# Altium PCB 28Pins_Projects_V1I1_PCB.PcbDoc (part 1 of 2)
Units mil, origin at the board's own origin, x right, y up, seen from the top; angles counter-clockwise.
Board outline 2700 x 2100 mil, 2 copper layers (Top Layer, Bottom Layer), stack 61.756 mil thick; 106 components, 71 nets, 323 pads, 0 vias.
Unrouted connection lines stored in the file: 236.
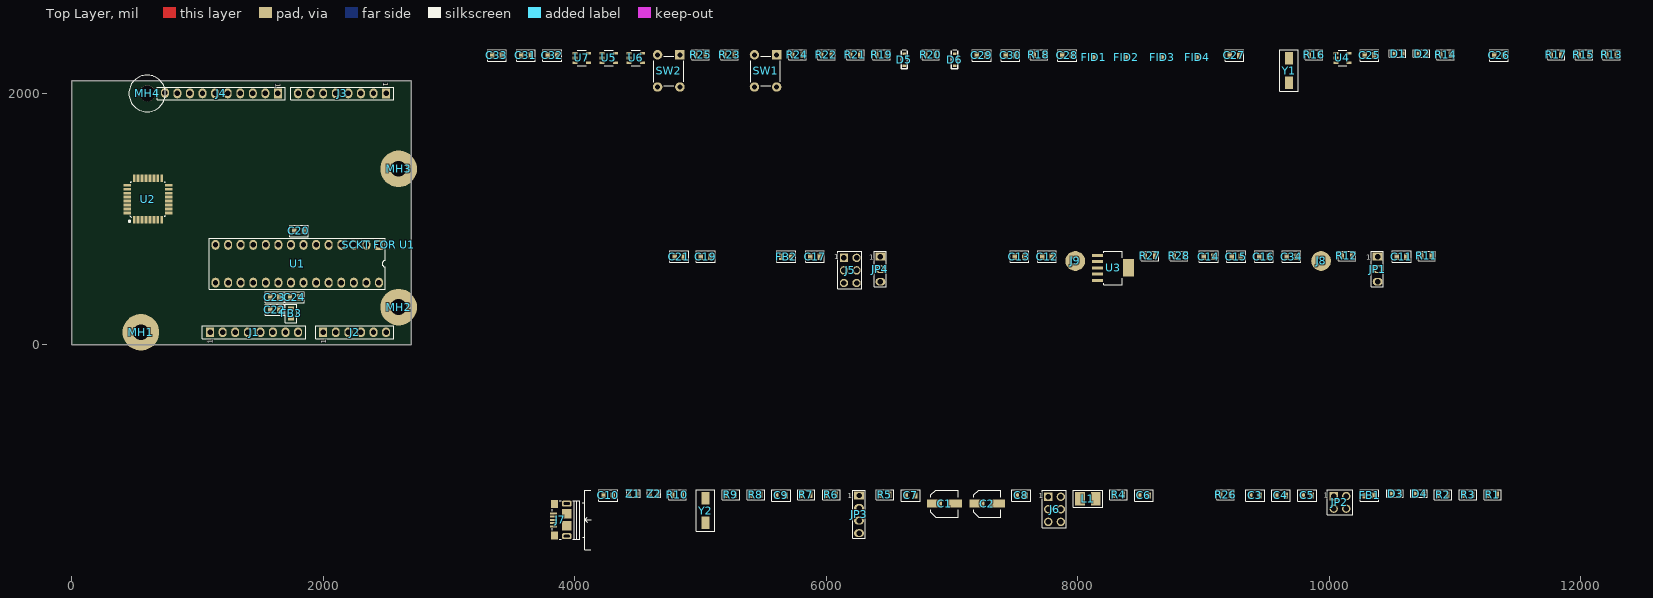
[diagram p0: Top Layer view]
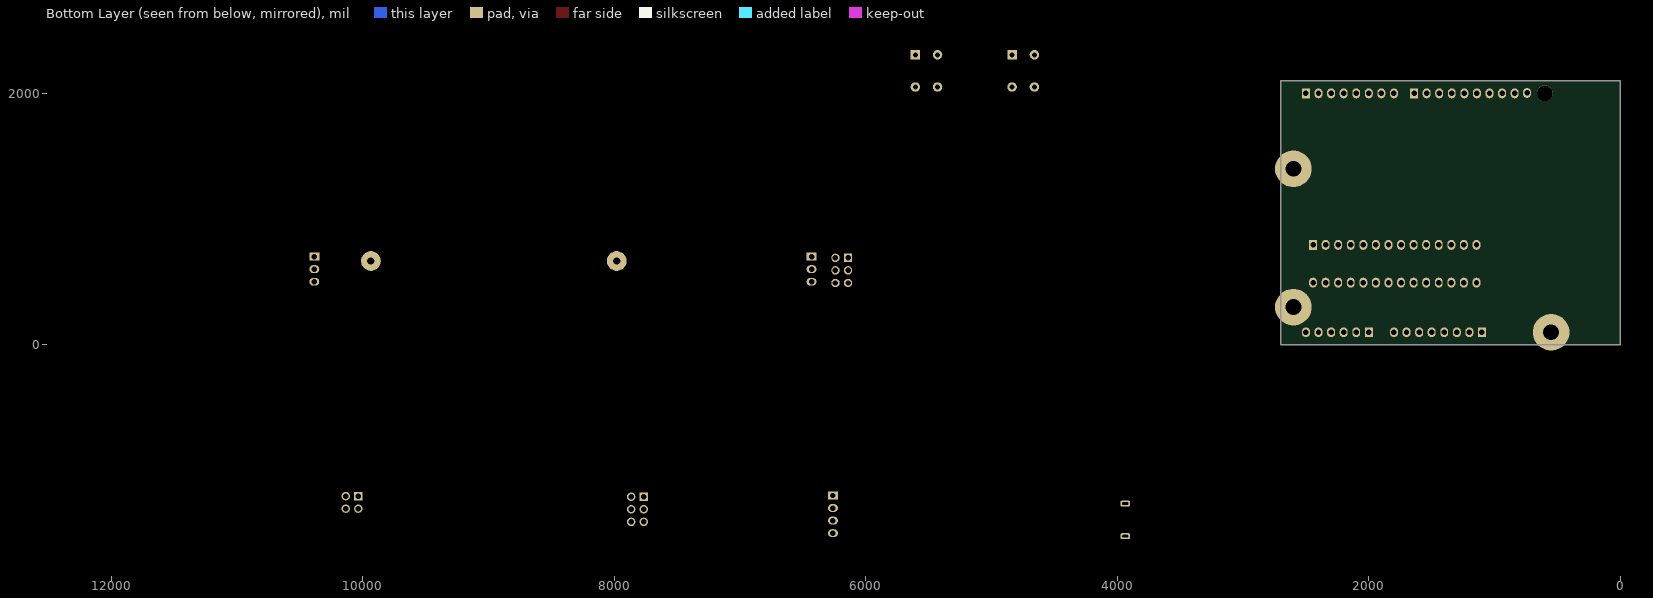
[diagram p1: Bottom Layer view, seen from below]

## Layer stack, top to bottom
Top Solder: solder mask 1, SM-001, Dk 4
Top Layer: signal copper 1.378
Dielectric 1: core 59, Core-043, Dk 4.3
Bottom Layer: signal copper 1.378
Bottom Solder: solder mask 1, SM-001, Dk 4

## Board outline
0,0 2700,0 2700,2100 0,2100

## Design rules (kind name [scope] priority, off if disabled: settings)
Clearance [All] p1: gap=10 ignorepadtopadclearanceinfootprint=FALSE except(0: Arc-Hole Track-Hole SMDPad-Hole THPad-Hole Via-Hole Fill-Hole Poly-Hole Region-Hole Text-Hole)
PolygonConnect [All] p1: connectstyle=Relief reliefconductorwidth=10 reliefentries=4 polygonreliefangle="90 Angle" airgapwidth=10
RoutingVias [All] p1: holewidth=28 width=50 viastyle="Through Hole" minholewidth=28 minwidth=50 maxholewidth=28 maxwidth=50
SolderMaskExpansion [All] p1: expansion=4 istentingtop=FALSE
Width [All] p1: maxlimit=10 minlimit=10 preferedwidth=10
30 further rules are at their usual default settings.

## Components (designator, comment, footprint, x,y, rotation, side; value= is the part's Value field where it differs from the comment)
C1 "100uF / 10V" C_AUL_C_SIZE 6941.97,-1263.03 r0 top
C2 "100uF / 10V" C_AUL_C_SIZE 7281.97,-1263.03 r0 top
C3 "10uF/16V" C0805 9411.97,-1198.03 r0 top
C4 "100n" C0805 9616.97,-1198.03 r0 top
C5 "100n" C0805 9826.97,-1198.03 r0 top
C6 "100n" C0805 8526.97,-1198.03 r0 top
C7 "1uF / 25V" C0805 6671.97,-1198.03 r0 top
C8 "100n" C0805 7551.97,-1198.03 r0 top
C9 "18pF" C0805 5641.97,-1198.03 r0 top
C10 "18pF" C0805 4266.97,-1198.03 r0 top
C11 "100n" C0805 10576.97,701.97 r0 top
C12 "10uF/16V" C0805 7756.97,701.97 r0 top
C13 "10uF/16V" C0805 7536.97,701.97 r0 top
C14 "100n" C0805 9041.97,701.97 r0 top
C15 "100n" C0805 9261.97,701.97 r0 top
C16 "100n" C0805 9481.97,701.97 r0 top
C17 "100n" C0805 5911.97,701.97 r0 top
C19 "10uF/16V" C0805 5041.97,701.97 r0 top
C20 "100n" C0805 1807.09,905.51 r0 top
C21 "10uF/16V" C0805 4831.97,701.97 r0 top
C22 "10uF/16V" C0805 1614.6,279 r0 top
C23 "100n" C0805 1614.6,378 r0 top
C24 "100n" C0805 1773.4,379 r180 top
C25 "18pF" C0805 10321.97,2301.97 r0 top
C26 "100n" C0805 11351.97,2301.97 r0 top
C27 "18pF" C0805 9246.97,2301.97 r0 top
C28 "100n" C0805 7916.97,2301.97 r0 top
C29 "100n" C0805 7236.97,2301.97 r0 top
C30 "100n" C0805 7466.97,2301.97 r0 top
C31 "100n" C0805 3611.97,2301.97 r0 top
C32 "100n" C0805 3821.97,2301.97 r0 top
C33 "100n" C0805 3381.97,2301.97 r0 top
C34 "10uF/16V" C0805 9701.97,701.97 r0 top
D1 "Green" LED_0603 10551.97,2316.97 r0 top
D2 "Orange LED" LED_0603 10741.97,2316.97 r0 top
D3 "Orange LED" LED_0603 10531.97,-1183.03 r0 top
D4 "Orange LED" LED_0603 10721.97,-1183.03 r0 top
D5 "BAT54HT1G" SOD323 6621.97,2266.97 r90 top
D6 "BAT54HT1G" SOD323 7021.97,2266.97 r90 top
FB1 "MPZ2012S601AT000" C0805 10321.97,-1198.03 r0 top
FB2 "MPZ2012S601AT000" C0805 5681.97,701.97 r0 top
FB3 "MPZ2012S601AT000" C0805 1744,249.6 r90 top
FID1 "FID_1MMC" FID_40X120D 8126.97,2286.97 r0 top
FID2 "FID_1MMC" FID_40X120D 8386.97,2286.97 r90 top
FID3 "FID_1MMC" FID_40X120D 8671.97,2286.97 r90 top
FID4 "FID_1MMC" FID_40X120D 8951.97,2286.97 r90 top
J1 "HRD FEMALE 1x8 2.54mm" Hdr_Female_1x8_2.54mm 1100,100 r90 top locked
J2 "HDR FEMALE 1x6 2.54mm" Hdr_Female_1x6_2.54mm 2000,100 r90 top locked
J3 "HRD FEMALE 1x8 2.54mm" Hdr_Female_1x8_2.54mm 2500,2000 r270 top locked
J4 "HEADER FEMALE 1x10 2.54mm" Hdr_Female_1x10_2.54mm 1640,2000 r270 top locked
J5 "HDR_2x3" HDR_2x3_2.54MM 6141.97,691.97 r0 top
J6 "HDR_2x3" HDR_2x3_2.54MM 7766.97,-1208.03 r0 top
J7 "10118193-0001LF" 10118193 3831.97,-1443.03 r90 top
J8 "4MMx1.5MM" PAD_WITH_HOLE_4MMx1.5MM 9936.97,666.97 r0 top
J9 "4MMx1.5MM" PAD_WITH_HOLE_4MMx1.5MM 7981.97,666.97 r0 top
JP1 "HRD_1x3" Hdr_Male_1x3_2.54mm 10386.97,601.97 r0 top
JP2 "HDR_2x2" HDR_2x2_2.54MM 10036.97,-1203.03 r0 top
JP3 "HDR_1x4_2.5MM" Hdr_Male_1x4_2.54mm 6261.97,-1348.03 r0 top
JP4 "HRD_1x3" Hdr_Male_1x3_2.54mm 6431.97,601.97 r0 top
L1 "2u2 / 2A" C1210_IND 8081.97,-1223.03 r0 top
MH1 "MH_7.4MMC_3.2MMD" MH_7.4MMD_3.2MMD 550,100 r0 top locked
MH2 "MH_7.4MMC_3.2MMD" MH_7.4MMD_3.2MMD 2600,300 r0 top locked
MH3 "MH_7.4MMC_3.2MMD" MH_7.4MMD_3.2MMD 2600,1400 r0 top locked
MH4 "MH_7.4MM_NC_3.2MMD" MH_7.4MMD_3.2MMD_NON_COPPER_NPHT 600,2000 r0 top locked
R1 "10K" R0805 11301.97,-1193.03 r0 top
R2 "560R" R0805 10906.97,-1193.03 r0 top
R3 "560R" R0805 11106.97,-1193.03 r0 top
R4 "10K" R0805 8326.97,-1193.03 r0 top
R5 "22R" R0805 6466.97,-1193.03 r0 top
R6 "22R" R0805 6041.97,-1193.03 r0 top
R7 "22R" R0805 5841.97,-1193.03 r0 top
R8 "0R" R0805 5441.97,-1193.03 r0 top
R9 "1M" R0805 5241.97,-1193.03 r0 top
R10 "1K" R0805 4816.97,-1193.03 r0 top
R11 "1K" R0805 10776.97,706.97 r0 top
R12 "1K" R0805 10141.97,706.97 r0 top
R13 "22R" R0805 12246.97,2306.97 r0 top
R14 "10K" R0805 10926.97,2306.97 r0 top
R15 "560R" R0805 12026.97,2306.97 r0 top
R16 "1M" R0805 9881.97,2306.97 r0 top
R17 "560R" R0805 11806.97,2306.97 r0 top
R18 "10K" R0805 7691.97,2306.97 r0 top
R19 "10K" R0805 6441.97,2306.97 r0 top
R20 "10K" R0805 6831.97,2306.97 r0 top
R21 "10K" R0805 6231.97,2306.97 r0 top
R22 "560R" R0805 6001.97,2306.97 r0 top
R23 "22R" R0805 5231.97,2306.97 r0 top
R24 "22R" R0805 5771.97,2306.97 r0 top
R25 "22R" R0805 5001.97,2306.97 r0 top
R26 "0R" R0805 9176.97,-1193.03 r0 top
R27 "0R" R0805 8576.97,706.97 r0 top
R28 "0R" R0805 8806.97,706.97 r0 top
"SCKT FOR U1" "28-DIP Socket" 28_DIP_7.62MM_SOCKET 2443.5,795 r270 top locked
SW1 "1825910-6" 1825910-6 5606.97,2306.97 r0 top
SW2 "1825910-6" 1825910-6 4836.97,2306.97 r0 top
U1 "ATMEGA328P-PU" 28_DIP_7.62MM 2443.5,795 r270 top locked
U2 "ATMEGA16U2-AU" TQFP32 606.3,1181.1 r90 top locked
U3 "TL1963A-33DCQR" DC1(R-PDSO-G6) 8281.97,611.97 r0 top
U4 "SN74AHC1G09DBVR" DBV_SOT_23_5 10106.97,2281.97 r0 top
U5 "SN74AHC1G09DBVR" DBV_SOT_23_5 4271.97,2281.97 r0 top
U6 "SN74AHC1G09DBVR" DBV_SOT_23_5 4486.97,2281.97 r0 top
U7 "SN74AHC1G09DBVR" DBV_SOT_23_5 4056.97,2281.97 r0 top
Y1 "ABM7-16.000MHZ-D2Y-T" ABM7_v1_1_BIG 9681.97,2181.97 r90 top
Y2 "ABM7-16.000MHZ-D2Y-T" ABM7_v1_1_BIG 5041.97,-1318.03 r90 top
Z1 "CG0603MLC-05E" R0603 4466.97,-1183.03 r0 top
Z2 "CG0603MLC-05E" R0603 4631.97,-1183.03 r0 top

## Footprints (in the part's own frame and the unit in brackets; to place one, negate y for a bottom-side part, rotate by r counter-clockwise, add the part's x,y. Pads: shape width x height; smd on the part's side, far side on the other; paste and mask are expansions set on the pad)
28_DIP_7.62MM [mm]
  rect 2x1.6 hole 1.1: 1(0,0)
  oval 2x1.6 hole 1.1: 2(0,-2.54) 3(0,-5.08) 4(0,-7.62) 5(0,-10.16) 6(0,-12.7) 7(0,-15.24) 8(0,-17.78) 9(0,-20.32) 10(0,-22.86) 11(0,-25.4) 12(0,-27.94) 13(0,-30.48) 14(0,-33.02) 15(7.62,-33.02) 16(7.62,-30.48) 17(7.62,-27.94) 18(7.62,-25.4) 19(7.62,-22.86) 20(7.62,-20.32) 21(7.62,-17.78) 22(7.62,-15.24) 23(7.62,-12.7) 24(7.62,-10.16) 25(7.62,-7.62) 26(7.62,-5.08) 27(7.62,-2.54) 28(7.62,0)
  silkscreen extent -1.39,-34.31 9.01,1.29, body extent -0.19,-34.42 7.68,1.52, height 7.55
28_DIP_7.62MM_SOCKET [mil]
  body extent -49,-1349 349,49, height 165
1825910-6 [mm]
  rect 1.9x1.9 hole 1: 1(0,0)
  round 1.9 hole 1: 2(0,-6.5) 3(-4.5,0) 4(-4.5,-6.5)
  silkscreen extent -5.25,-6.25 0.75,-0.25, body extent -5.25,-7.15 0.75,0.65, height 5.01
10118193 [mm]
  rect 0.4x1.35 smd mask+0.05: 1(0,0) 2(0.65,0) 3(1.3,0) 4(1.95,0) 5(2.6,0)
  rect 1.6x1.4 smd: 6(-1.9,-0.225) 7(4.5,-0.225)
  rrect60% 1.2x2 hole 0.5 slot 1.2 at 90 deg: 8(-2,-2.675) 9(4.6,-2.675)
  rect 1.9x1.9 smd: 10(0.1,-2.675) 11(2.5,-2.675)
  silkscreen extent -4.7,-7.64 7.3,0.26, body extent -2.63,-5.41 5.23,0.3, height 2.81
ABM7_v1_1_BIG [mm]
  rect 2.5x1.6 smd: 1(-2.45,0) 2(2.45,0)
  silkscreen extent -4.17,-1.83 4.16,1.89, body extent -3.12,-1.92 3.09,1.88, height 1.36
C0805 [mm]
  rect 0.9x1.3 smd: 1(-0.95,0) 2(0.95,0)
  silkscreen extent -1.88,-1.13 1.91,1.14, body extent -1.01,-0.6 0.99,0.6, height 1.45
C1210_IND [mm]
  rect 2x2.7 smd: 1(-1.6,0) 2(1.6,0)
  silkscreen extent -2.94,-1.71 2.96,1.71, body extent -1.6,-1.44 2.87,1.27, height 5.41
C_AUL_C_SIZE [mm]
  rect 3x1.6 smd: 1(-2.05,0) 2(2.05,0)
  silkscreen extent -2.75,-2.75 2.75,2.75, body extent -2.95,-2.65 2.95,2.65, height 5.41
DBV_SOT_23_5 [mm]
  rect 1x0.55 smd: 1(-1.35,0.95) 2(-1.35,0) 3(-1.35,-0.95) 4(1.35,-0.95) 5(1.35,0.95)
  silkscreen extent -0.9,-1.6 0.91,1.6, body extent -1.51,-1.52 1.51,1.52, height 1.61
DC1(R-PDSO-G6) [mm]
  rect 2.2x0.6 smd: 1(-3.1,2.54) 2(-3.1,1.27) 3(-3.1,0) 4(-3.1,-1.27) 5(-3.1,-2.54)
  rect 2.2x3.5 smd: 6(3.1,0)
  silkscreen extent -1.9,-3.4 1.9,3.4, body extent -3.63,-3.28 3.63,3.27, height 1.79
FID_40X120D [mil]
  round 40 smd paste-40 mask+40: 1(0,0)
HDR_2x2_2.54MM [mm]
  rect 1.7x1.7 hole 1.1: 1(0,0)
  round 1.7 hole 1.1: 2(2.54,0) 3(0,-2.54) 4(2.54,-2.54)
  silkscreen extent -1.27,-3.76 3.81,1.24, body extent -1.27,-3.77 3.81,1.23, height 7.51
HDR_2x3_2.54MM [mm]
  rect 1.7x1.7 hole 1.1: 1(0,0)
  round 1.7 hole 1.1: 2(2.54,0) 3(0,-2.54) 4(2.54,-2.54) 5(0,-5.08) 6(2.54,-5.08)
  silkscreen extent -1.22,-6.27 3.61,1.35, body extent -1.22,-6.27 3.61,1.35, height 8.39
Hdr_Female_1x6_2.54mm [mm]
  rect 2x1.6 hole 1.1: 1(0,0)
  oval 2x1.6 hole 1.1: 2(0,-2.54) 3(0,-5.08) 4(0,-7.62) 5(0,-10.16) 6(0,-12.7)
  silkscreen extent -1.27,-14.22 1.27,1.52, body extent -1.25,-14.17 1.25,1.47, height 8.31
Hdr_Female_1x8_2.54mm [mm]
  rect 2x1.6 hole 1.1: 1(0,0)
  oval 2x1.6 hole 1.1: 2(0,-2.54) 3(0,-5.08) 4(0,-7.62) 5(0,-10.16) 6(0,-12.7) 7(0,-15.24) 8(0,-17.78)
  silkscreen extent -1.27,-19.3 1.27,1.52, body extent -1.25,-19.25 1.25,1.47, height 8.31
Hdr_Female_1x10_2.54mm [mm]
  rect 2x1.6 hole 1.1: 1(0,0)
  oval 2x1.6 hole 1.1: 2(0,-2.54) 3(0,-5.08) 4(0,-7.62) 5(0,-10.16) 6(0,-12.7) 7(0,-15.24) 8(0,-17.78) 9(0,-20.32) 10(-0.093,-22.823)
  silkscreen extent -1.27,-24.38 1.27,1.52, body extent -1.25,-24.33 1.25,1.47, height 8.31
Hdr_Male_1x3_2.54mm [mm]
  rect 2x1.6 hole 1.1: 1(0,2.54)
  oval 2x1.6 hole 1.1: 2(0,0) 3(0,-2.54)
  silkscreen extent -1.27,-3.59 1.15,3.61, body extent -1.27,-3.61 1.14,3.61, height 8.19
Hdr_Male_1x4_2.54mm [mm]
  rect 2x1.6 hole 1.1: 1(0,3.81)
  oval 2x1.6 hole 1.1: 2(0,1.27) 3(0,-1.27) 4(0,-3.81)
  silkscreen extent -1.27,-4.86 1.27,4.87, body extent -1.2,-4.88 1.2,4.88, height 8.19
LED_0603 [mm]
  rect 0.8x0.8 smd: 1(-0.8,0) 2(0.8,0)
  silkscreen extent -1.88,-0.73 1.5,0.74, body extent -0.84,-0.4 0.86,0.4, height 0.65
MH_7.4MMD_3.2MMD [mm]
  round 7.4 hole 3.2: 1(0,0)
MH_7.4MMD_3.2MMD_NON_COPPER_NPHT [mm]
  round 3.2 hole 3.2 unplated: 1(0,0)
  silkscreen extent -3.7,-3.7 3.7,3.7
PAD_WITH_HOLE_4MMx1.5MM [mm]
  round 4 hole 1.5: 1(0,0)
R0603 [mm]
  rect 0.6x0.9 smd: 1(-0.75,0) 2(0.75,0)
  silkscreen extent -1.37,-0.74 1.37,0.74, body extent -0.8,-0.4 0.8,0.4, height 0.85
R0805 [mm]
  rect 0.7x1.3 smd: 1(-0.95,0) 2(0.95,0)
  silkscreen extent -1.76,-0.99 1.76,0.99, body extent -0.98,-0.6 1.02,0.6, height 0.71
SOD323 [mil]
  rect 22x27 smd: A(-48,0) K(48,0)
  silkscreen extent -72,-25 80,25, body extent -50,-27 49,22, height 37
TQFP32 [mm]
  rect 1.5x0.55 smd mask+0.06: 1(-4.75,2.8) 2(-4.75,2) 3(-4.75,1.2) 4(-4.75,0.4) 5(-4.75,-0.4) 6(-4.75,-1.2) 7(-4.75,-2) 8(-4.75,-2.8) 17(3.65,-2.8) 18(3.65,-2) 19(3.65,-1.2) 20(3.65,-0.4) 21(3.65,0.4) 22(3.65,1.2) 23(3.65,2) 24(3.65,2.8)
  rect 0.55x1.5 smd mask+0.06: 9(-3.35,-4.2) 10(-2.55,-4.2) 11(-1.75,-4.2) 12(-0.95,-4.2) 13(-0.15,-4.2) 14(0.65,-4.2) 15(1.45,-4.2) 16(2.25,-4.2) 25(2.25,4.2) 26(1.45,4.2) 27(0.65,4.2) 28(-0.15,4.2) 29(-0.95,4.2) 30(-1.75,4.2) 31(-2.55,4.2) 32(-3.35,4.2)
  silkscreen extent -5.12,-3.5 2.96,3.83, body extent -5.14,-4.57 4.06,4.63, height 1.2

## Part data
C1 C2: library part EEE-1AA101WR, "CAP ALUM 100UF 20% 10V SMD", Capacitance=100uF, Case/Package=Radial, Manufacturer=Panasonic, Max Operating Temperature=85°C, Min Operating Temperature=-40°C, Package Quantity=1000, Ratings=AEC-Q200, Ripple Current=50mA, Supplier Part Number 1=PCE3867CT-ND, Tolerance=20%, Voltage Rating=10V, Category="Aluminum Electrolytic Capacitors", ComponentLink1Description=https://datasheet.ciiva.com/26945/getdatasheetpartid-169213-26945071.pdf?src-supplier=Verical, ComponentLink1URL=https://datasheet.ciiva.com/26945/getdatasheetpartid-169213-26945071.pdf?src-supplier=Verical, ComponentLink2Description=https://datasheet.ciiva.com/24027/aba0000ce2-40801-24027541.pdf?src-supplier=Mouser, ComponentLink2URL=https://datasheet.ciiva.com/24027/aba0000ce2-40801-24027541.pdf?src-supplier=Mouser, ComponentLink3Description=https://datasheet.ciiva.com/14598/70255710-14598233.pdf?src-supplier=Allied+Electronics, ComponentLink3URL=https://datasheet.ciiva.com/14598/70255710-14598233.pdf?src-supplier=Allied+Electronics, ComponentLink4Description=https://datasheet.ciiva.com/14605/70255710-14605689.pdf?src-supplier=Allied+Electronics, ComponentLink4URL=https://datasheet.ciiva.com/14605/70255710-14605689.pdf?src-supplier=Allied+Electronics, ComponentLink5Description=https://datasheet.ciiva.com/11673/aba0000ce2-11673882.pdf?src-supplier=Avnet, ComponentLink5URL=https://datasheet.ciiva.com/11673/aba0000ce2-11673882.pdf?src-supplier=Avnet, ComponentLink6Description=https://datasheet.ciiva.com/16427/aba0000ce2-16427544.pdf?src-supplier=Future+Electronics, ComponentLink6URL=https://datasheet.ciiva.com/16427/aba0000ce2-16427544.pdf?src-supplier=Future+Electronics, ComponentLink7Description=https://datasheet.ciiva.com/2983/aba0000ce2-2983906.pdf?src-supplier=Avnet, ComponentLink7URL=https://datasheet.ciiva.com/2983/aba0000ce2-2983906.pdf?src-supplier=Avnet, ComponentLink8Description=https://datasheet.ciiva.com/30075/11aba0000ce2-30075303.pdf?src-supplier=Onlinecomponents.com, ComponentLink8URL=https://datasheet.ciiva.com/30075/11aba0000ce2-30075303.pdf?src-supplier=Onlinecomponents.com, Construction=Cylindrical, Contact Plating=Tin, Diameter=5mm, Height=5.4mm, Height - Seated (Max)=0.213inch, Lead Free="Lead Free", Length=5.5mm, Life (Hours)=1000Hour, Manufacturer Part Number=EEE-1AA101WR, Mount="Surface Mount,PCB", Packaging="Tape and Reel", Pricing 1="1=0.42000, 10=0.29100, 50=0.20380, 100=0.17480, 500=0.13106 (USD)", Radiation Hardening=No, Ripple Current (AC)=50mA, RoHS=Yes, RoHS Compliant=Yes, Series=S, Supplier 1=Digi-Key, Termination=SMD/SMT, Voltage Rating (DC)=10V
C3 C12 C13 C19 C21 C22 C34: library part C2012X5R1C106M085AC, "TDK - C2012X5R1C106M085AC - SMD Multilayer Ceramic Capacitor, 10 µF, 16 V, 0805 [2012 Metric], ± 20%, X5R, C Series TDK", Capacitance=10uF, Case Code (Imperial)=0805, Case Code (Metric)=2012, Dielectric=X5R, Dielectric Material=Ceramic, Manufacturer=TDK, Max Operating Temperature=85°C, Min Operating Temperature=-55°C, Package Quantity=4000, Tolerance=20%, Voltage=16V, Case/Package=0805, Category="Ceramic Capacitors", ComponentLink1Description=https://datasheet.ciiva.com/11788/0900766b80c1bb00-11788108.pdf?src-supplier=Rs, ComponentLink1URL=https://datasheet.ciiva.com/11788/0900766b80c1bb00-11788108.pdf?src-supplier=Rs, ComponentLink2Description=https://datasheet.ciiva.com/24218/c2012x5r1c106m085ac-265002-24218340.pdf?src-supplier=Mouser, ComponentLink2URL=https://datasheet.ciiva.com/24218/c2012x5r1c106m085ac-265002-24218340.pdf?src-supplier=Mouser, ComponentLink3Description=https://datasheet.ciiva.com/6290/tdkmlcccaprange-6290485.pdf?src-supplier=Digi-Key, ComponentLink3URL=https://datasheet.ciiva.com/6290/tdkmlcccaprange-6290485.pdf?src-supplier=Digi-Key, ComponentLink4Description=https://datasheet.ciiva.com/22725/1913358-22725557.pdf?src-supplier=Element14, ComponentLink4URL=https://datasheet.ciiva.com/22725/1913358-22725557.pdf?src-supplier=Element14, ComponentLink5Description=https://datasheet.ciiva.com/6290/tdkmlcccaprange-6290487.pdf?src-supplier=Digi-Key, ComponentLink5URL=https://datasheet.ciiva.com/6290/tdkmlcccaprange-6290487.pdf?src-supplier=Digi-Key, ComponentLink6Description=https://datasheet.ciiva.com/16449/e412-c-16449591.pdf?src-supplier=Future+Electronics, ComponentLink6URL=https://datasheet.ciiva.com/16449/e412-c-16449591.pdf?src-supplier=Future+Electronics, ComponentLink7Description=https://datasheet.ciiva.com/23803/1796654-23803021.pdf?src-supplier=Newark, ComponentLink7URL=https://datasheet.ciiva.com/23803/1796654-23803021.pdf?src-supplier=Newark, Construction=Flat, Depth=1.25mm, Height=0.85mm, Lead Free="Lead Free", Length=2mm, Manufacturer Part Number=C2012X5R1C106M085AC, Mount="Surface Mount", Number of Pins=2, Packaging="Tape and Reel", Pricing 1="1=0.26740, 10=0.11160, 25=0.11140, 50=0.10840, 100=0.08930, 250=0.08850, 500=0.05410 (USD)", Resistor Type=Ceramic, RoHS=Yes, RoHS Compliant=Yes, Series=C, Stock 1=888, Supplier 1="Arrow Electronics", Supplier Part Number 1=C2012X5R1C106M085AC, Termination=SMD/SMT, Thickness=0.037inch, Voltage Rating=16V, Voltage Rating (DC)=16V, Weight=0.000194oz, Width=1.25mm
C4 C5 C6 C8 C11 C14 C15 C16 C17 C20 C23 C24 C26 C28 C29 C30 C31 C32 C33: library part "C2012X7R1H104K085AA (2)", "C Series 0805 0.1 uF 50 V ±10 % Tolerance X7R SMT Multilayer Ceramic Capacitor", Capacitance=100nF, Case Code (Imperial)=0805, Case Code (Metric)=2012, Dielectric=X7R, Dielectric Material=Ceramic, Manufacturer=TDK, Manufacturer Part Number=C2012X7R1H104K085AA, Max Operating Temperature=125°C, Min Operating Temperature=-55°C, Package Quantity=1, Supplier Part Number 1=445-7534-1-ND, Tolerance=10%, Voltage=50V, Case/Package=0805, Category="Ceramic Capacitors", ComponentLink1Description=https://datasheet.ciiva.com/11788/0900766b80c1bb00-11788128.pdf?src-supplier=Rs, ComponentLink1URL=https://datasheet.ciiva.com/11788/0900766b80c1bb00-11788128.pdf?src-supplier=Rs, ComponentLink2Description=https://datasheet.ciiva.com/6250/tdkmlcccaprange-6250821.pdf?src-supplier=Digi-Key, ComponentLink2URL=https://datasheet.ciiva.com/6250/tdkmlcccaprange-6250821.pdf?src-supplier=Digi-Key, ComponentLink3Description=https://datasheet.ciiva.com/24191/e412-c-24191447.pdf?src-supplier=Future+Electronics, ComponentLink3URL=https://datasheet.ciiva.com/24191/e412-c-24191447.pdf?src-supplier=Future+Electronics, ComponentLink4Description=https://datasheet.ciiva.com/6250/tdkmlcccaprange-6250824.pdf?src-supplier=Digi-Key, ComponentLink4URL=https://datasheet.ciiva.com/6250/tdkmlcccaprange-6250824.pdf?src-supplier=Digi-Key, ComponentLink5Description=https://datasheet.ciiva.com/23803/1796654-23803035.pdf?src-supplier=Newark, ComponentLink5URL=https://datasheet.ciiva.com/23803/1796654-23803035.pdf?src-supplier=Newark, ComponentLink6Description=https://datasheet.ciiva.com/28602/1571323-28602204.pdf?src-supplier=Element14, ComponentLink6URL=https://datasheet.ciiva.com/28602/1571323-28602204.pdf?src-supplier=Element14, Construction=Flat, Depth=1.25mm, Height=0.85mm, Lead Free="Lead Free", Length=2mm, Mount="Surface Mount", Number of Pins=2, Packaging="Tape and Reel", Pricing 1="1=0.13000, 10=0.09500, 50=0.05400, 100=0.04480, 500=0.03142, 1000=0.02601 (USD)", Radiation Hardening=No, Reach SVHC Compliant=Yes, Resistor Type=Ceramic, RoHS=Yes, RoHS Compliant=Yes, Series=C, Stock 1=1523417, Supplier 1=Digi-Key, Termination=SMD/SMT, Thickness=0.037inch, Voltage Rating=50V, Voltage Rating (DC)=50V, Weight=0.000194oz, Width=0.049inch
C7: library part C2012X5R1E105K125AA, "CAP CER 1UF 25V X5R 0805", Capacitance=1uF, Case Code (Imperial)=0805, Case Code (Metric)=2012, Dielectric=X5R, Dielectric Material=Ceramic, Manufacturer=TDK, Max Operating Temperature=85°C, Min Operating Temperature=-55°C, Package Quantity=2000, Supplier Part Number 1=445-1419-1-ND, Tolerance=10%, Voltage=25V, Case/Package=0805, Category="Ceramic Capacitors", ComponentLink1Description=https://datasheet.ciiva.com/11787/0900766b80c1bb00-11787608.pdf?src-supplier=Rs, ComponentLink1URL=https://datasheet.ciiva.com/11787/0900766b80c1bb00-11787608.pdf?src-supplier=Rs, ComponentLink2Description=https://datasheet.ciiva.com/16449/e412-c-16449595.pdf?src-supplier=Future+Electronics, ComponentLink2URL=https://datasheet.ciiva.com/16449/e412-c-16449595.pdf?src-supplier=Future+Electronics, ComponentLink3Description=https://datasheet.ciiva.com/28602/1744655-28602171.pdf?src-supplier=Element14, ComponentLink3URL=https://datasheet.ciiva.com/28602/1744655-28602171.pdf?src-supplier=Element14, ComponentLink4Description=https://datasheet.ciiva.com/15192/getdatasheetpartid-726707-15192140.pdf?src-supplier=Verical, ComponentLink4URL=https://datasheet.ciiva.com/15192/getdatasheetpartid-726707-15192140.pdf?src-supplier=Verical, Construction=Flat, Depth=1.25mm, Height=1.25mm, Lead Free="Lead Free", Length=2mm, Manufacturer Part Number=C2012X5R1E105K125AA, Mount="Surface Mount", Number of Pins=2, Packaging="Tape and Reel", Pricing 1="1=0.21000, 10=0.14500, 50=0.08720, 100=0.07370, 500=0.05042, 1000=0.04460 (USD)", Radiation Hardening=No, Reach SVHC Compliant=Yes, Resistor Type=Ceramic, RoHS=Yes, RoHS Compliant=Yes, Series=C, Stock 1=51550, Supplier 1=Digi-Key, Termination=SMD/SMT, Thickness=0.057inch, Voltage Rating=25V, Voltage Rating (DC)=25V, Weight=0.000194oz, Width=0.049inch
C9 C10 C25 C27: library part C0805C180J5GACTU, "Cap Ceramic 18pF 50V C0G 5% SMD 0805 125C Paper T/R", Case Code (Imperial)=0805, Case Code (Metric)=2012, Dielectric=C0G, Dielectric Material=Ceramic, Manufacturer=KEMET, Max Operating Temperature=125°C, Min Operating Temperature=-55°C, Package Quantity=1, Supplier Part Number 1=399-C0805C180J5GAC7800CT-ND, Temperature Coefficient=30ppm/°C, Tolerance=5%, Voltage=50V, Capacitance=18pF, Case/Package=0805, Category="Ceramic Capacitors", ComponentLink1Description=https://datasheet.ciiva.com/22746/1769375-22746770.pdf?src-supplier=Element14, ComponentLink1URL=https://datasheet.ciiva.com/22746/1769375-22746770.pdf?src-supplier=Element14, ComponentLink2Description=https://datasheet.ciiva.com/26923/getdatasheetpartid-759702-26923980.pdf?src-supplier=Verical, ComponentLink2URL=https://datasheet.ciiva.com/26923/getdatasheetpartid-759702-26923980.pdf?src-supplier=Verical, ComponentLink3Description=https://datasheet.ciiva.com/26847/getdatasheetpartid-385668-26847862.pdf?src-supplier=Verical, ComponentLink3URL=https://datasheet.ciiva.com/26847/getdatasheetpartid-385668-26847862.pdf?src-supplier=Verical, Construction=Flat, Contact Material=Tin, Contact Plating=Tin,Matte, Depth=1.25mm, Dissipation Factor=0.1%, Height=0.78mm, Lead Free="Lead Free", Lead Pitch=0.75mm, Length=2mm, Manufacturer Part Number=C0805C180J5GACTU, Mount="Surface Mount,PCB", Number of Pins=2, Packaging="Tape and Reel", Pricing 1="1=0.11000, 10=0.07900, 50=0.04500, 100=0.03730, 500=0.02618, 1000=0.02168 (USD)", Radiation Hardening=No, Reach SVHC Compliant=Yes, RoHS=Yes, RoHS Compliant=Yes, Series=C, Stock 1=36847, Supplier 1=Digi-Key, Termination=SMD/SMT, Thickness=0.035inch, Voltage Rating=50V, Voltage Rating (DC)=50V, Width=0.049inch
D1: library part LGL29K-G2J1-24-Z, "LED Single Chip Green 570nm 20mA 2-Pin 0603 T/R", Case Code (Imperial)=0603, Case Code (Metric)=1608, Forward Current=20mA, Forward Voltage=2.2V, Lens Color=White, Manufacturer="Osram Opto", Max Operating Temperature=100°C, Min Operating Temperature=-40°C, Package Quantity=5000, Reverse Voltage=12V, Test Current=2mA, Case/Package=0603, Category=LEDs, Color=Green, ComponentLink1Description=https://datasheet.ciiva.com/4689/g-l29k-39844-4689584.pdf?src-supplier=Mouser, ComponentLink1URL=https://datasheet.ciiva.com/4689/g-l29k-39844-4689584.pdf?src-supplier=Mouser, ComponentLink2Description=https://datasheet.ciiva.com/15198/getdatasheetpartid-571127-15198411.pdf?src-supplier=Verical, ComponentLink2URL=https://datasheet.ciiva.com/15198/getdatasheetpartid-571127-15198411.pdf?src-supplier=Verical, ComponentLink3Description=https://datasheet.ciiva.com/2112/00077107-0-2112887.pdf?src-supplier=Digi-Key, ComponentLink3URL=https://datasheet.ciiva.com/2112/00077107-0-2112887.pdf?src-supplier=Digi-Key, ComponentLink4Description=https://datasheet.ciiva.com/2112/00077107-0-2112886.pdf?src-supplier=Digi-Key, ComponentLink4URL=https://datasheet.ciiva.com/2112/00077107-0-2112886.pdf?src-supplier=Digi-Key, ComponentLink5Description=https://datasheet.ciiva.com/2112/00077107-0-2112888.pdf?src-supplier=Digi-Key, ComponentLink5URL=https://datasheet.ciiva.com/2112/00077107-0-2112888.pdf?src-supplier=Digi-Key, Depth=0.8mm, Dominant Wavelength=570nm, Height=0.65mm, Illumination Color=Green, Length=1.3mm, Lens Size=0.8mm, Lens Style=Flat,Diffused,Colorless,Rectangular, Lens Transparency=Diffused, Luminous Flux=0.012lm, Luminous Intensity=5.6mcd, Manufacturer Part Number=LGL29K-G2J1-24-Z, Mount="Surface Mount", Number of Elements=1, Number of LEDs=1, Number of Pins=2, Packaging="Tape and Reel", Pricing 1="5=0.07900, 10=0.07800, 100=0.08000, 1000=0.07000, 10000=0.07000 (USD)", Radiation Hardening=No, RoHS=Yes, RoHS Compliant=Yes, Series=SmartLED, Stock 1=8400, Supplier 1="SHENGYU ELECTRONICS", Supplier Part Number 1=LGL29K-G2J1-24-Z, Viewing Angle=160°, Width=0.8mm
D2 D3 D4: library part LOL29K-H2K1-24, "LED Uni-Color Orange 610nm 2-Pin Case 0603 T/R", Case/Package=1608, Color=Orange, Forward Current=20mA, Forward Voltage=2.2V, Lens Color=Clear, Manufacturer="Osram Opto", Max Operating Temperature=100°C, Min Operating Temperature=-40°C, Reverse Voltage=12V, Supplier Part Number 1=720-LOL29KH2K124Z, Test Current=2mA, Category=LEDs, ComponentLink1Description=https://datasheet.ciiva.com/11775/0900766b80d1573e-11775188.pdf?src-supplier=Rs, ComponentLink1URL=https://datasheet.ciiva.com/11775/0900766b80d1573e-11775188.pdf?src-supplier=Rs, Depth=0.8mm, Dominant Wavelength=606nm, Length=1.3mm, Lens Style=Diffused,Colorless, Luminous Flux=0.025lm, Luminous Intensity=9mcd, Manufacturer Part Number=LOL29K-H2K1-24, Mount="Surface Mount", Number of Elements=1, Number of LEDs=1, Number of Pins=2, Packaging="Tape and Reel", Pricing 1="1=0.46000, 10=0.31000, 50=0.31000, 100=0.20700, 1000=0.12000, 10000=0.09200 (USD)", RoHS=Yes, RoHS Compliant=Yes, Series=SmartLED, Stock 1=21307, Supplier 1=Mouser, Viewing Angle=160°
D5 D6: "VR=30V IF=200mA 10pF P=200mW", Average Rectified Current=200mA, Capacitance=10pF, Forward Voltage=800mV, Manufacturer="ON Semiconductor / Fairchild", Max Forward Surge Current (Ifsm)=600mA, Max Operating Temperature=150°C, Max Repetitive Reverse Voltage (Vrrm)=30V, Max Reverse Current=2uA, Min Operating Temperature=-55°C, Package Quantity=1, Power Dissipation=200mW, Supplier Part Number 1=BAT54HT1GOSCT-ND, Category="Schottky Diodes", ComponentLink1Description=https://datasheet.ciiva.com/30479/0900766b811a63a9-30479442.pdf?src-supplier=Rs, ComponentLink1URL=https://datasheet.ciiva.com/30479/0900766b811a63a9-30479442.pdf?src-supplier=Rs, ComponentLink2Description=https://datasheet.ciiva.com/1240/1747983-1240762.pdf?src-supplier=Newark, ComponentLink2URL=https://datasheet.ciiva.com/1240/1747983-1240762.pdf?src-supplier=Newark, ComponentLink3Description=https://datasheet.ciiva.com/34301/806549-34301562.pdf?src-supplier=Jameco, ComponentLink3URL=https://datasheet.ciiva.com/34301/806549-34301562.pdf?src-supplier=Jameco, ComponentLink4Description=https://datasheet.ciiva.com/4452/bat54ht1g-104602-4452889.pdf?src-supplier=Mouser, ComponentLink4URL=https://datasheet.ciiva.com/4452/bat54ht1g-104602-4452889.pdf?src-supplier=Mouser, ComponentLink5Description=https://datasheet.ciiva.com/4714/bat54ht1-d-72881-4714706.pdf?src-supplier=Mouser, ComponentLink5URL=https://datasheet.ciiva.com/4714/bat54ht1-d-72881-4714706.pdf?src-supplier=Mouser, ComponentLink6Description=https://datasheet.ciiva.com/1180/bat54ht1-d-1180252.pdf?src-supplier=Element14, ComponentLink6URL=https://datasheet.ciiva.com/1180/bat54ht1-d-1180252.pdf?src-supplier=Element14, ComponentLink7Description=https://datasheet.ciiva.com/1180/bat54ht1-d-1180251.pdf?src-supplier=Element14, ComponentLink7URL=https://datasheet.ciiva.com/1180/bat54ht1-d-1180251.pdf?src-supplier=Element14, ComponentLink8Description=https://datasheet.ciiva.com/915/bat54ht1-d-915443.pdf?src-supplier=Digi-Key, ComponentLink8URL=https://datasheet.ciiva.com/915/bat54ht1-d-915443.pdf?src-supplier=Digi-Key, ComponentLink9Description=https://datasheet.ciiva.com/8303/bat54ht1g-8303645.pdf?src-supplier=Avnet, ComponentLink9URL=https://datasheet.ciiva.com/8303/bat54ht1g-8303645.pdf?src-supplier=Avnet, ComponentLink10Description=https://datasheet.ciiva.com/17020/bat54ht1g-17020445.pdf?src-supplier=Future+Electronics, ComponentLink10URL=https://datasheet.ciiva.com/17020/bat54ht1g-17020445.pdf?src-supplier=Future+Electronics, ComponentLink11Description=https://datasheet.ciiva.com/8294/bat54ht1-d-8294645.pdf?src-supplier=Avnet, ComponentLink11URL=https://datasheet.ciiva.com/8294/bat54ht1-d-8294645.pdf?src-supplier=Avnet, ComponentLink12Description=https://datasheet.ciiva.com/910/bat54ht1g-910498.pdf?src-supplier=Digi-Key, ComponentLink12URL=https://datasheet.ciiva.com/910/bat54ht1g-910498.pdf?src-supplier=Digi-Key, ComponentLink13Description=https://datasheet.ciiva.com/910/bat54ht1g-910499.pdf?src-supplier=Digi-Key, ComponentLink13URL=https://datasheet.ciiva.com/910/bat54ht1g-910499.pdf?src-supplier=Digi-Key, ComponentLink14Description=https://datasheet.ciiva.com/915/bat54ht1-d-915444.pdf?src-supplier=Digi-Key, ComponentLink14URL=https://datasheet.ciiva.com/915/bat54ht1-d-915444.pdf?src-supplier=Digi-Key, ComponentLink15Description=https://datasheet.ciiva.com/915/bat54ht1-d-915445.pdf?src-supplier=Digi-Key, ComponentLink15URL=https://datasheet.ciiva.com/915/bat54ht1-d-915445.pdf?src-supplier=Digi-Key, ComponentLink16Description=https://datasheet.ciiva.com/46429/1727620-46429206.pdf?src-supplier=Element14, ComponentLink16URL=https://datasheet.ciiva.com/46429/1727620-46429206.pdf?src-supplier=Element14, ComponentLink17Description=https://datasheet.ciiva.com/910/bat54ht1g-910497.pdf?src-supplier=Digi-Key, ComponentLink17URL=https://datasheet.ciiva.com/910/bat54ht1g-910497.pdf?src-supplier=Digi-Key, ComponentLink18Description=https://datasheet.ciiva.com/48686/001262925-da-01-en-diode-schottky-30v-bat54ht1g-sod-323-fsc-48686266.pdf?src-supplier=Conrad, ComponentLink18URL=https://datasheet.ciiva.com/48686/001262925-da-01-en-diode-schottky-30v-bat54ht1g-sod-323-fsc-48686266.pdf?src-supplier=Conrad, Contact Plating=Tin,Matte, Current Rating=200mA, Element Configuration=Single, Forward Current=200mA, Height=1mm, Lead Free="Lead Free", Length=1.8mm, Manufacturer Part Number=BAT54HT1G, Max Reverse Leakage Current=2uA, Max Reverse Voltage (DC)=30V, Max Surge Current=600mA, Mount="Surface Mount", Number of Pins=2, Output Current=200mA, Packaging="Tape and Reel", Peak Non-Repetitive Surge Current=600mA, Polarity=Standard, Pricing 1="1=0.24000, 10=0.19900, 100=0.10570, 500=0.06956, 1000=0.04730 (USD)", Radiation Hardening=No, Reach SVHC Compliant=Yes, Recovery Time=5ns, Reverse Recovery Time=5ns, Reverse Recovery Time-Max=5ns, Reverse Voltage=30V, RoHS=Yes, RoHS Compliant=Yes, Series=-, Stock 1=64443, Supplier 1=Digi-Key, Voltage Rating (DC)=30V, Width=1.35mm
FB1 FB2 FB3: "0805 600Ω ±25% DCR=0.1Ω 2A", Case Code (Imperial)=0805, Case Code (Metric)=2012, Current Rating=2A, DC Resistance (DCR)=100mR, Manufacturer=TDK, Max Operating Temperature=125°C, Min Operating Temperature=-55°C, Package Quantity=1, Supplier Part Number 1=89R3160, Case/Package=0805, Category="Ferrite Beads and Chips", ComponentLink1Description=https://datasheet.ciiva.com/46634/beads-commercial-power-mpz-en-46634335.pdf?src-supplier=Digi-Key, ComponentLink1URL=https://datasheet.ciiva.com/46634/beads-commercial-power-mpz-en-46634335.pdf?src-supplier=Digi-Key, ComponentLink2Description=https://datasheet.ciiva.com/46634/beads-commercial-power-mpz-en-46634377.pdf?src-supplier=Digi-Key, ComponentLink2URL=https://datasheet.ciiva.com/46634/beads-commercial-power-mpz-en-46634377.pdf?src-supplier=Digi-Key, ComponentLink3Description=https://datasheet.ciiva.com/46634/beads-commercial-power-mpz-en-46634606.pdf?src-supplier=Digi-Key, ComponentLink3URL=https://datasheet.ciiva.com/46634/beads-commercial-power-mpz-en-46634606.pdf?src-supplier=Digi-Key, Height=0.041inch, Impedance=600R, Lead Free="Lead Free", Length=0.079inch, Manufacturer Part Number=MPZ2012S601AT000, Max Current Rating=2A, Max DC Current=2A, Mount="Surface Mount", Number of Lines=1, Packaging="Tape and Reel", Pricing 1="1=0.13000, 25=0.10100, 50=0.07400, 100=0.04600 (USD)", Reach SVHC Compliant=Yes, RoHS=Yes, RoHS Compliant=Yes, Series=MPZ, Stock 1=12934, Supplier 1=Newark, Width=0.049inch
FID1 FID2 FID3 FID4: "Fiducial 40mil Diameter, 120mil Mask"
J1 J3: library part M20-7820842, "2.54mm (0.1\") Pitch SIL Vertical PC Tail Socket Assembly, selective gold + tin, 8 contacts", Case/Package=SIL, Color=Black, Contact Resistance=20mR, Manufacturer=Harwin, Max Current Rating=3A, Max Operating Temperature=105°C, Min Operating Temperature=-40°C, Package Quantity=29, Supplier Part Number 1=952-1823-ND, Category="Headers and Wire Housings", ComponentLink1Description=https://datasheet.ciiva.com/16732/m20-782-16732663.pdf?src-supplier=Avnet+Europe, ComponentLink1URL=https://datasheet.ciiva.com/16732/m20-782-16732663.pdf?src-supplier=Avnet+Europe, ComponentLink2Description=https://datasheet.ciiva.com/9480/m20-782-9480074.pdf?src-supplier=Avnet, ComponentLink2URL=https://datasheet.ciiva.com/9480/m20-782-9480074.pdf?src-supplier=Avnet, Connector Type=Receptacle,Socket, Contact Gender=Female, Contact Material=Bronze, Contact Plating=Tin,Gold, Depth=2.5mm, Gender=Female, Housing Color=Black, Housing Material=Polyamide, Length=20.72mm, Manufacturer Part Number=M20-7820842, Mount="Through Hole", Number of Contacts=8, Number of Positions=8, Number of Rows=1, Orientation=Straight, Packaging=Rail/Tube, Pitch=2.54mm, Pricing 1="1=1.10000, 10=0.97200, 100=0.83820, 500=0.68580, 1000=0.60960, 5000=0.53340, 10000=0.50673 (USD)", Radiation Hardening=No, RoHS=Yes, Stock 1=1355, Supplier 1=Digi-Key, Termination=Solder, Weight=0.025397oz
J2: library part M20-7820646, "06-WAY SIL VERT SOCKET L/FREE", Case/Package=SIL, Color=Black, Contact Resistance=20mR, Manufacturer=Harwin, Max Current Rating=3A, Max Operating Temperature=105°C, Min Operating Temperature=-40°C, Package Quantity=38, Supplier Part Number 1=952-1809-ND, Category="Headers and Wire Housings", ComponentLink1Description=http://components.arrow.com/part/dataview/0323_00725884?src-supplier=Arrow+Europe, ComponentLink1URL=http://components.arrow.com/part/dataview/0323_00725884?src-supplier=Arrow+Europe, ComponentLink2Description=http://www.harwin.com/include/downloads/pdfs/2010PAGE120.PDF?src-supplier=Avnet, ComponentLink2URL=http://www.harwin.com/include/downloads/pdfs/2010PAGE120.PDF?src-supplier=Avnet, ComponentLink3Description=https://cdn.harwin.com/pdfs/M20-782.pdf?src-supplier=Digi-Key, ComponentLink3URL=https://cdn.harwin.com/pdfs/M20-782.pdf?src-supplier=Digi-Key, ComponentLink4Description=https://cdn.harwin.com/pdfs/Harwin_PC_Connectors_M20.pdf?src-supplier=Avnet+Europe, ComponentLink4URL=https://cdn.harwin.com/pdfs/Harwin_PC_Connectors_M20.pdf?src-supplier=Avnet+Europe, ComponentLink5Description=https://cdn.harwin.com/pdfs/Harwin_PC_Connectors_M20.pdf?src-supplier=RSComponents, ComponentLink5URL=https://cdn.harwin.com/pdfs/Harwin_PC_Connectors_M20.pdf?src-supplier=RSComponents, ComponentLink6Description=https://cdn.harwin.com/pdfs/Harwin_PC_Connectors_M20.pdf?src-supplier=Mouser, ComponentLink6URL=https://cdn.harwin.com/pdfs/Harwin_PC_Connectors_M20.pdf?src-supplier=Mouser, ComponentLink7Description=https://cdn.harwin.com/pdfs/Harwin_PC_Connectors_M20.pdf?src-supplier=TTI, ComponentLink7URL=https://cdn.harwin.com/pdfs/Harwin_PC_Connectors_M20.pdf?src-supplier=TTI, Connector Type=Receptacle,Socket, Contact Gender=Female, Contact Material=Bronze, Contact Plating=Tin, Depth=2.5mm, Gender=Female, Housing Color=Black, Housing Material=Nylon, Length=15.64mm, Manufacturer Part Number=M20-7820646, Mount="Through Hole", Number of Contacts=6, Number of Positions=6, Number of Rows=1, Orientation=Straight, Packaging=Rail/Tube, Pitch=2.54mm, Pricing 1="1=0.96000, 10=0.84200, 100=0.72600, 500=0.59400, 1000=0.52800, 5000=0.46200, 10000=0.43890 (USD)", Radiation Hardening=No, RoHS=Yes, Stock 1=2220, Supplier 1=Digi-Key, Termination=Solder
J4: library part M20-7821046, "HARWIN - M20-7821046 - Board-To-Board Connector, M20 Series, Through Hole, Receptacle, 10, 2.54 mm, Tin Plated Contacts", Case/Package=SIL, Color=Black, Contact Resistance=20mR, Current Rating=3A, Insulation Resistance=1MR, Manufacturer=Harwin, Max Operating Temperature=105°C, Min Operating Temperature=-40°C, Package Quantity=23, Supplier Part Number 1=952-1847-ND, Category="Headers and Wire Housings", ComponentLink1Description=https://datasheet.ciiva.com/26899/getdatasheetpartid-559226-26899379.pdf?src-supplier=Verical, ComponentLink1URL=https://datasheet.ciiva.com/26899/getdatasheetpartid-559226-26899379.pdf?src-supplier=Verical, ComponentLink2Description=https://datasheet.ciiva.com/11753/0900766b80dc1d2b-11753869.pdf?src-supplier=RSComponents, ComponentLink2URL=https://datasheet.ciiva.com/11753/0900766b80dc1d2b-11753869.pdf?src-supplier=RSComponents, ComponentLink3Description=https://datasheet.ciiva.com/6785/m20-782-6785605.pdf?src-supplier=Digi-Key, ComponentLink3URL=https://datasheet.ciiva.com/6785/m20-782-6785605.pdf?src-supplier=Digi-Key, ComponentLink4Description=https://datasheet.ciiva.com/10151/m20-782-10151366.pdf?src-supplier=Avnet, ComponentLink4URL=https://datasheet.ciiva.com/10151/m20-782-10151366.pdf?src-supplier=Avnet, ComponentLink5Description=https://datasheet.ciiva.com/16732/m20-782-16732152.pdf?src-supplier=Avnet+Europe, ComponentLink5URL=https://datasheet.ciiva.com/16732/m20-782-16732152.pdf?src-supplier=Avnet+Europe, Connector Type=Receptacle,Socket, Contact Gender=Female, Contact Material=Bronze, Contact Plating=Tin, Depth=2.5mm, Gender=Receptacle, Hole Diameter=0.8mm, Housing Color=Black, Housing Material=Polyamide, Lead Pitch=2.54mm, Length=25.8mm, Manufacturer Part Number=M20-7821046, Mating Cycles=50, Max Current Rating=3A, Mount="Through Hole", Number of Contacts=10, Number of Positions=10, Number of Rows=1, Orientation=Straight, Packaging=Rail/Tube, Pitch=2.54mm, Pricing 1="1=1.28000, 10=1.12200, 100=0.96800, 500=0.79200, 1000=0.70400, 5000=0.61600, 10000=0.58520 (USD)", Radiation Hardening=No, REACH SVHC="No SVHC", RoHS=Yes, Stock 1=530, Supplier 1=Digi-Key, Termination=Solder
J5 J6: library part 67997-106HLF, "Conn Unshrouded Header HDR 6 POS 2.54mm Solder ST Top Entry Thru-Hole BergStik® Bulk", Manufacturer="Amphenol ICC / FCI", Supplier Part Number 1=649-67997-106HLF, Category="Headers and Wire Housings", ComponentLink1Description=http://uk.rs-online.com/webdocs/1450/0900766b81450b8b.pdf?src-supplier=Rs, ComponentLink1URL=http://uk.rs-online.com/webdocs/1450/0900766b81450b8b.pdf?src-supplier=Rs, ComponentLink2Description=https://cdn.amphenol-icc.com/media/wysiwyg/files/drawing/67996.pdf?src-supplier=Onlinecomponents.com, ComponentLink2URL=https://cdn.amphenol-icc.com/media/wysiwyg/files/drawing/67996.pdf?src-supplier=Onlinecomponents.com, ComponentLink3Description=https://cdn.amphenol-icc.com/media/wysiwyg/files/drawing/67996.pdf?src-supplier=Digi-Key, ComponentLink3URL=https://cdn.amphenol-icc.com/media/wysiwyg/files/drawing/67996.pdf?src-supplier=Digi-Key, ComponentLink4Description=http://components.arrow.com/part/dataview/41913658S7633350N8314?src-supplier=Arrow+Electronics, ComponentLink4URL=http://components.arrow.com/part/dataview/41913658S7633350N8314?src-supplier=Arrow+Electronics, ComponentLink5Description=http://www.farnell.com/datasheets/1876884.pdf?src-supplier=Newark, ComponentLink5URL=http://www.farnell.com/datasheets/1876884.pdf?src-supplier=Newark, ComponentLink6Description=https://cdn.amphenol-icc.com/media/wysiwyg/files/drawing/67996.pdf?src-supplier=Allied+Electronics, ComponentLink6URL=https://cdn.amphenol-icc.com/media/wysiwyg/files/drawing/67996.pdf?src-supplier=Allied+Electronics, ComponentLink7Description=https://cdn.amphenol-icc.com/media/wysiwyg/files/drawing/67996.pdf?src-supplier=Mouser, ComponentLink7URL=https://cdn.amphenol-icc.com/media/wysiwyg/files/drawing/67996.pdf?src-supplier=Mouser, ComponentLink8Description=http://www.farnell.com/datasheets/1876884.pdf?src-supplier=Farnell, ComponentLink8URL=http://www.farnell.com/datasheets/1876884.pdf?src-supplier=Farnell, ComponentLink9Description=https://cdn.amphenol-icc.com/media/wysiwyg/files/drawing/67996.pdf?src-supplier=Avnet, ComponentLink9URL=https://cdn.amphenol-icc.com/media/wysiwyg/files/drawing/67996.pdf?src-supplier=Avnet, ComponentLink10Description=https://cdn.amphenol-icc.com/media/wysiwyg/files/drawing/67996.pdf?src-supplier=TTI, ComponentLink10URL=https://cdn.amphenol-icc.com/media/wysiwyg/files/drawing/67996.pdf?src-supplier=TTI, ComponentLink11Description=https://cdn.amphenol-icc.com/media/wysiwyg/files/drawing/67996.pdf?src-supplier=Heilind+Electronics, ComponentLink11URL=https://cdn.amphenol-icc.com/media/wysiwyg/files/drawing/67996.pdf?src-supplier=Heilind+Electronics, Manufacturer Part Number=67997-106HLF, Pricing 1="1=2.25000, 10=2.14000, 50=2.14000, 100=1.98000, 1000=1.41000, 10000=1.20000 (USD)", RoHS=No, Stock 1=1180, Supplier 1=Mouser
J7: "FCI Right Angle Surface Mount Mount Female USB Connector; 100 V ac; 1.8A", Manufacturer="Amphenol ICC / FCI", Supplier Part Number 1=C132562, Category="USB Connectors", ComponentLink1Description=http://uk.rs-online.com/webdocs/1450/0900766b814507f1.pdf?src-supplier=Rs, ComponentLink1URL=http://uk.rs-online.com/webdocs/1450/0900766b814507f1.pdf?src-supplier=Rs, ComponentLink2Description=http://www.amphenol-icc.com/media/wysiwyg/files/drawing/10118193.pdf?src-supplier=Digi-Key, ComponentLink2URL=http://www.amphenol-icc.com/media/wysiwyg/files/drawing/10118193.pdf?src-supplier=Digi-Key, ComponentLink3Description=https://cdn.amphenol-icc.com/media/wysiwyg/files/documentation/datasheet/inputoutput/io_usb_micro.pdf?src-supplier=Digi-Key, ComponentLink3URL=https://cdn.amphenol-icc.com/media/wysiwyg/files/documentation/datasheet/inputoutput/io_usb_micro.pdf?src-supplier=Digi-Key, ComponentLink4Description=https://cdn.amphenol-icc.com/media/wysiwyg/files/documentation/datasheet/inputoutput/io_usb_micro.pdf?src-supplier=Onlinecomponents.com, ComponentLink4URL=https://cdn.amphenol-icc.com/media/wysiwyg/files/documentation/datasheet/inputoutput/io_usb_micro.pdf?src-supplier=Onlinecomponents.com, ComponentLink5Description=https://cdn.amphenol-icc.com/media/wysiwyg/files/documentation/datasheet/inputoutput/io_usb_micro.pdf?src-supplier=Verical, ComponentLink5URL=https://cdn.amphenol-icc.com/media/wysiwyg/files/documentation/datasheet/inputoutput/io_usb_micro.pdf?src-supplier=Verical, ComponentLink6Description=https://cdn.amphenol-icc.com/media/wysiwyg/files/documentation/datasheet/inputoutput/io_usb_micro.pdf?src-supplier=Allied+Electronics, ComponentLink6URL=https://cdn.amphenol-icc.com/media/wysiwyg/files/documentation/datasheet/inputoutput/io_usb_micro.pdf?src-supplier=Allied+Electronics, ComponentLink7Description=https://cdn.amphenol-icc.com/media/wysiwyg/files/documentation/datasheet/inputoutput/io_usb_micro.pdf?src-supplier=Mouser, ComponentLink7URL=https://cdn.amphenol-icc.com/media/wysiwyg/files/documentation/datasheet/inputoutput/io_usb_micro.pdf?src-supplier=Mouser, ComponentLink8Description=https://cdn.amphenol-icc.com/media/wysiwyg/files/documentation/datasheet/inputoutput/io_usb_micro.pdf?src-supplier=Avnet, ComponentLink8URL=https://cdn.amphenol-icc.com/media/wysiwyg/files/documentation/datasheet/inputoutput/io_usb_micro.pdf?src-supplier=Avnet, ComponentLink9Description=https://cdn.amphenol-icc.com/media/wysiwyg/files/documentation/datasheet/inputoutput/io_usb_micro.pdf?src-supplier=Arrow+Electronics, ComponentLink9URL=https://cdn.amphenol-icc.com/media/wysiwyg/files/documentation/datasheet/inputoutput/io_usb_micro.pdf?src-supplier=Arrow+Electronics, ComponentLink10Description=https://cdn.amphenol-icc.com/media/wysiwyg/files/documentation/datasheet/inputoutput/io_usb_micro.pdf?src-supplier=Rs, ComponentLink10URL=https://cdn.amphenol-icc.com/media/wysiwyg/files/documentation/datasheet/inputoutput/io_usb_micro.pdf?src-supplier=Rs, ComponentLink11Description=https://cdn.amphenol-icc.com/media/wysiwyg/files/documentation/datasheet/inputoutput/io_usb_micro.pdf?src-supplier=TTI, ComponentLink11URL=https://cdn.amphenol-icc.com/media/wysiwyg/files/documentation/datasheet/inputoutput/io_usb_micro.pdf?src-supplier=TTI, ComponentLink12Description=https://cdn.amphenol-icc.com/media/wysiwyg/files/documentation/datasheet/inputoutput/io_usb_micro.pdf?src-supplier=TME, ComponentLink12URL=https://cdn.amphenol-icc.com/media/wysiwyg/files/documentation/datasheet/inputoutput/io_usb_micro.pdf?src-supplier=TME, ComponentLink13Description=https://cdn.amphenol-icc.com/media/wysiwyg/files/documentation/datasheet/inputoutput/io_usb_micro.pdf?src-supplier=Heilind+Electronics, ComponentLink13URL=https://cdn.amphenol-icc.com/media/wysiwyg/files/documentation/datasheet/inputoutput/io_usb_micro.pdf?src-supplier=Heilind+Electronics, Manufacturer Part Number=10118193-0001LF, Pricing 1="1=0.21760, 10=0.17060, 30=0.14770, 100=0.12730, 500=0.12170, 1200=0.11830 (USD)", RoHS=No, Stock 1=268, Supplier 1=LCSC
J8 J9: library part PAD_WITH_HOLE_4MMx1.5MM, "Pad with a Hole 4mm X 1.5mm"
JP1 JP4: library part 68000-103HLF, "Conn Unshrouded Header HDR 3 POS 2.54mm Solder ST Top Entry Thru-Hole BergStik® Automotive Bulk", Manufacturer="Amphenol ICC / FCI", Supplier Part Number 1=88K1775, Category="Headers and Wire Housings", ComponentLink1Description=https://datasheet.ciiva.com/46392/1914865-46392021.pdf?src-supplier=Element14, ComponentLink1URL=https://datasheet.ciiva.com/46392/1914865-46392021.pdf?src-supplier=Element14, Manufacturer Part Number=68000-103HLF, Pricing 1="1=0.40100, 10=0.28000, 25=0.27600, 50=0.27400, 100=0.27000, 250=0.25200, 500=0.23400 (USD)", RoHS=No, Stock 1=5922, Supplier 1=Avnet
JP2: library part 68602-204HLF, "Conn Unshrouded Header HDR 4 POS 2.54mm Solder ST Top Entry Thru-Hole BergStik® Bulk", Manufacturer="Amphenol ICC / FCI", Supplier Part Number 1=28AH8858, Category=Connectors, ComponentLink1Description=https://cdn.amphenol-icc.com/media/wysiwyg/files/drawing/67996.pdf?src-supplier=Digi-Key, ComponentLink1URL=https://cdn.amphenol-icc.com/media/wysiwyg/files/drawing/67996.pdf?src-supplier=Digi-Key, ComponentLink2Description=https://cdn.amphenol-icc.com/media/wysiwyg/files/drawing/67996.pdf?src-supplier=Allied+Electronics, ComponentLink2URL=https://cdn.amphenol-icc.com/media/wysiwyg/files/drawing/67996.pdf?src-supplier=Allied+Electronics, ComponentLink3Description=https://cdn.amphenol-icc.com/media/wysiwyg/files/drawing/67996.pdf?src-supplier=Mouser, ComponentLink3URL=https://cdn.amphenol-icc.com/media/wysiwyg/files/drawing/67996.pdf?src-supplier=Mouser, ComponentLink4Description=https://cdn.amphenol-icc.com/media/wysiwyg/files/drawing/67996.pdf?src-supplier=Avnet, ComponentLink4URL=https://cdn.amphenol-icc.com/media/wysiwyg/files/drawing/67996.pdf?src-supplier=Avnet, ComponentLink5Description=https://cdn.amphenol-icc.com/media/wysiwyg/files/drawing/67996.pdf?src-supplier=Heilind+Electronics, ComponentLink5URL=https://cdn.amphenol-icc.com/media/wysiwyg/files/drawing/67996.pdf?src-supplier=Heilind+Electronics, Manufacturer Part Number=68602-204HLF, Pricing 1="1=0.36700, 10=0.24900, 25=0.23400, 50=0.22000, 100=0.20500, 250=0.19300 (USD)", RoHS=No, Stock 1=10, Supplier 1=Avnet
JP3: library part 68001-204HLF, "Conn Unshrouded Header HDR 4 POS 2.54mm Solder ST Thru-Hole Bag", Manufacturer="Amphenol ICC", Supplier Part Number 1=609-3402-ND, Category=Uncategorized, ComponentLink1Description=http://www.farnell.com/cad/2615197.pdf?src-supplier=Farnell, ComponentLink1URL=http://www.farnell.com/cad/2615197.pdf?src-supplier=Farnell, ComponentLink2Description=http://www.farnell.com/cad/2615197.pdf?src-supplier=Newark, ComponentLink2URL=http://www.farnell.com/cad/2615197.pdf?src-supplier=Newark, Manufacturer Part Number=68001-204HLF, Pricing 1="1=0.480000, 10=0.407000, 100=0.316200, 500=0.271060, 1000=0.225890, 5000=0.193620, 10000=0.180710 (USD)", RoHS=Yes, Stock 1=8220, Supplier 1=Digi-Key